# Altium PCB STM32_BalanceCar.PcbDoc (part 2 of 2)
Units mil, origin at the board's own origin, x right, y up, seen from the top; angles counter-clockwise.
Board outline 2206.41 x 3228.35 mil, 4 copper layers (Top Layer, Mid-Layer 1, Mid-Layer 2, Bottom Layer); 124 components, 106 nets, 508 pads, 271 vias.
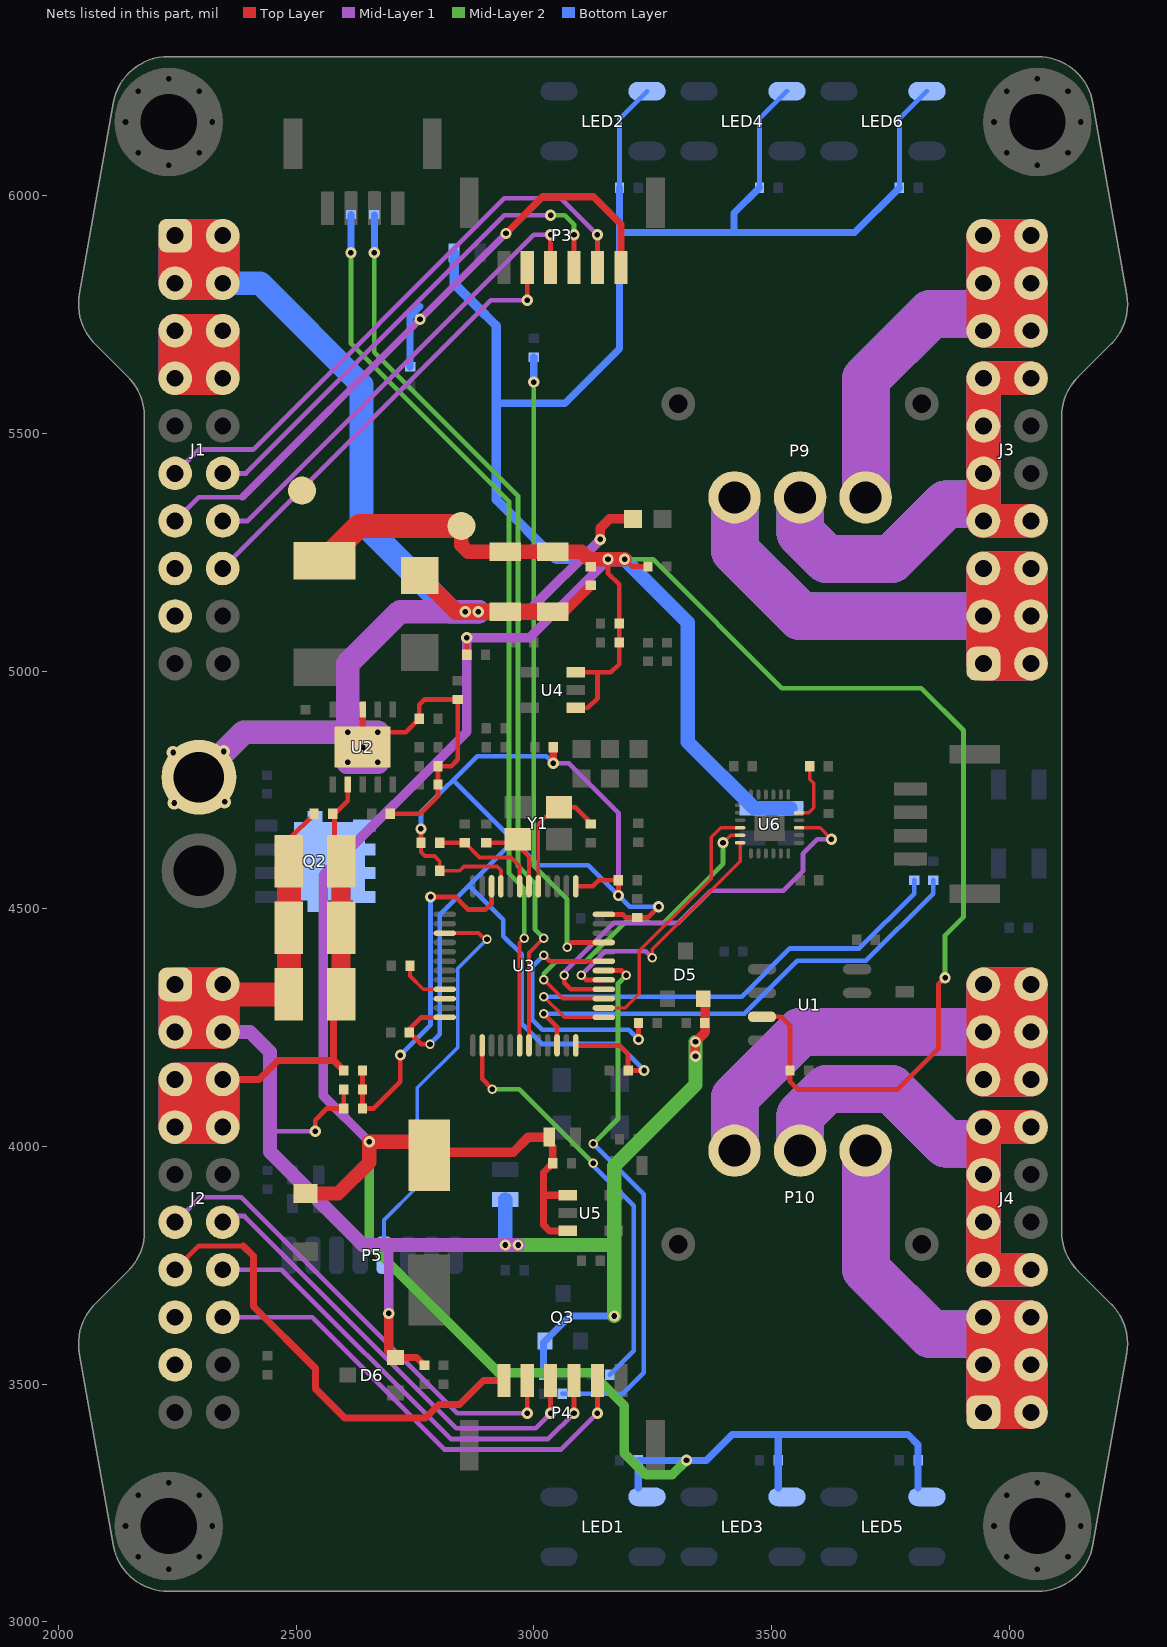
[diagram p4: the nets of this part, all layers, seen from the top]

## Via types
v1: diameter 23.62, hole 11.81, Top Layer to Bottom Layer, tented both sides, 229 vias
v2: diameter 19.68, hole 11.81, Top Layer to Bottom Layer, tented both sides, 29 vias
v3: diameter 27.56, hole 11.81, Top Layer to Bottom Layer, tented both sides, 8 vias
v4: diameter 22, hole 12, Top Layer to Bottom Layer, tented both sides, 5 vias

## Nets (pads, with @x,y where several pads share a name; then routed paths per layer and width w, separated by ;. In a path a pad name is that pad's centre, name@x,y a point inside that pad or via, vN(x,y) a via of type N, cw(c..) or ccw(c..) an arc to the next point about the centre after c; other vN are vias at no path point) (continued)
NetR26_2: R26.2 U6.11 | length 126.1
  Top Layer w7: U6.11@3558.07,4701.97 3577.97,4701.97 3589,4713 3589,4764.03 3580.32,4772.72 R26.2@3580.32,4800
NRST: C20.1 R11.2 U3.7 | length 231
  Top Layer w8: C20.1@2855,4639 2886,4608 2952,4608 2970.16,4589.84 U3.7@2970.16,4547.32
  Top Layer w10: R11.2@2802,4639 C20.1@2855,4639
PGND: C6.1 C10.1 C11.1 C12.1 C13.1 C14.1 C15.1 C16.1 C17.1 C18.1 C19.1 D1.1 D5.2 D6.2 D9.2 J1.1 J1.2 J1.3 J1.4 J2.1 J2.2 J2.3 J2.4 P6.2 pad.1@2512.35,5379.54 Q3.2 R2.2 R10.2 R13.1 R21.2 R25.1 R40.2 R51.2 U2.0 U2.8 | length 9785.1
  Top Layer w10: C10.1@2485,4646 C13.1@2539,4700 ; v1(2540.32,4032.26) 2540.32,4055.27 2565.05,4080 C6.1@2600.32,4080 R2.2@2600.32,4120 ; v4(2671.5,4871.5) 2730.5,4871.5 C18.1@2759,4900 2759,4929 2770.32,4940.31 R13.1@2840,4940.31 ; C14.1@2698.37,4700 2761.69,4700 2798.37,4736.68 C19.1@2798.37,4800 2826,4800 2840,4814 R13.1@2840,4939
  Top Layer w13.78: v4(2640,4840) U2.8@2640,4918.74
  Top Layer w15: D6.2@2709.2,3556.4 2753.28,3556.4 R40.2@2770,3539.68
  Top Layer w20: v1(2695.02,3649.05) 2695.02,3570.58 D6.2@2709.2,3556.4 ; C16.1@3040,5125 3066,5125 C17.1@3120.66,5179.66 ; v1(3140,5277) 3140,5301.02 3158.98,5320 D9.2@3209,5320 ; v1(3340,4190) v1(3340,4220) 3361,4241 D5.2@3361,4306.2
  Top Layer w35: D1.1@2760,5201 2836,5125 C16.1@3040,5125
  Top Layer w50: J2.2@2369.67,4320 C12.1@2485,4320 2485,4599.22 C10.1@2484.61,4599.61
  Top Layer w70.87: J2.1@2245.67,4340.95 J2.3@2245.67,4240.95 J2.4@2345.67,4240.95 ; J2.1@2245.67,4340.95 J2.4@2345.67,4240.95 ; J2.1@2245.67,4340.95 J2.2@2345.67,4340.95 J2.4@2345.67,4240.95 ; J1.1@2245.67,5915.75 J1.3@2245.67,5815.75 J1.4@2345.67,5815.75 ; J1.1@2245.67,5915.75 J1.4@2345.67,5815.75 ; J1.1@2245.67,5915.75 J1.2@2345.67,5915.75 J1.4@2345.67,5815.75
  Mid-Layer 1 w10: 2445,4031.84 2445.42,4032.26 v1@2539,4032.26
  Mid-Layer 1 w20: v1(2695.02,3649.05) 2695.02,3793 ; v1(2883,5125) 2988,5125 v1(3140,5277)
  Mid-Layer 1 w30: J2.4@2345.67,4240.95 2403.05,4240.95 2445,4199 2445,3989 2641,3793 2695.02,3793 v1(2967,3793)
  Mid-Layer 1 w50: P6.2@2295.67,4776.77 2390.39,4871.5 v4(2608.5,4871.5) ; v1(2883,5125) 2719,5125 2608.5,5014.5 v4(2608.5,4871.5) ; v4(2608.5,4871.5) v4(2671.5,4871.5) v4(2671.5,4808.5) ; v4(2608.5,4871.5) v4(2671.5,4808.5) ; v4(2608.5,4871.5) v4(2608.5,4808.5) v4(2671.5,4808.5)
  Mid-Layer 2 w30: v1(2940,3793) 3169.2,3793 ; v1(3169.2,3643.49) 3169.2,3959.2 3340,4130 v1(3340,4220)
  Mid-Layer 2 w50: P6.2@2295.67,4776.77 2390.39,4871.5 v4(2608.5,4871.5) ; v4(2608.5,4871.5) v4(2671.5,4808.5) ; v4(2608.5,4871.5) v4(2671.5,4871.5) v4(2671.5,4808.5) ; v4(2608.5,4871.5) v4(2608.5,4808.5) v4(2671.5,4808.5)
  Bottom Layer w15: R51.2@3020.32,3520 Q3.2@3020.32,3587.52 ; Q3.2@3023.6,3590.8 3076.29,3643.49 v1(3169.2,3643.49)
  Bottom Layer w30: R21.2@2940,3888.5 v1(2940,3793) v1(2967,3793)
  Bottom Layer w50: J1.4@2345.67,5815.75 2424.31,5815.75 2637.82,5602.24 2637.82,5313.07 2825.89,5125 v1(2883,5125)
  Bottom Layer w70.87: J2.1@2245.67,4340.95 J2.2@2345.67,4340.95 J2.4@2345.67,4240.95 ; J2.1@2245.67,4340.95 J2.4@2345.67,4240.95 ; J2.1@2245.67,4340.95 J2.3@2245.67,4240.95 J2.4@2345.67,4240.95 ; J1.1@2245.67,5915.75 J1.2@2345.67,5915.75 J1.4@2345.67,5815.75 ; J1.1@2245.67,5915.75 J1.4@2345.67,5815.75 ; J1.1@2245.67,5915.75 J1.3@2245.67,5815.75 J1.4@2345.67,5815.75
  other v1: 2856,5125
  other v3: 2243.75,4722.63 2349.82,4724.85 2241.52,4828.69 2347.59,4830.92
POWER_EN: R50.1 U3.26 | length 880.6
  Top Layer w10: U3.26@2891.42,4212.68 2891.42,4142.18 v2(2912.97,4120.62)
  Mid-Layer 2 w10: v2(2912.97,4120.62) 2969.38,4120.62 v2(3125,3965)
  Bottom Layer w10: v2@3120,3965 3210,3875 3210,3570.32 R50.1@3159.68,3520
PVDD+: C10.2 C11.2 C12.2 C13.2 J1.5 J1.6 J1.7 J1.8 J2.5 J2.6 J2.7 J2.8 Q2.2 R1.1 U2.2 | length 3026.8
  Top Layer w10: C10.2@2581,4614 2581,4700 2608.5,4727.5 U2.2@2608.5,4761.26
  Top Layer w15: J2.6@2345.67,4140.95 2421.95,4140.95 2462,4181 2579,4181 C12.2@2579,4304 ; 2579.16,4181.16 R1.1@2600.32,4160
  Top Layer w40: C12.2@2595,4320 C10.2@2595,4619.57
  Top Layer w70.87: J2.5@2245.67,4140.95 J2.6@2345.67,4140.95 J2.8@2345.67,4040.95 ; J2.5@2245.67,4140.95 J2.8@2345.67,4040.95 ; J2.5@2245.67,4140.95 J2.7@2245.67,4040.95 J2.8@2345.67,4040.95 ; J1.5@2245.67,5715.75 J1.7@2245.67,5615.75 J1.8@2345.67,5615.75 ; J1.5@2245.67,5715.75 J1.8@2345.67,5615.75 ; J1.5@2245.67,5715.75 J1.6@2345.67,5715.75 J1.8@2345.67,5615.75
  Bottom Layer w70.87: J2.5@2245.67,4140.95 J2.7@2245.67,4040.95 J2.8@2345.67,4040.95 ; J2.5@2245.67,4140.95 J2.8@2345.67,4040.95 ; J2.5@2245.67,4140.95 J2.6@2345.67,4140.95 J2.8@2345.67,4040.95 ; J1.5@2245.67,5715.75 J1.6@2345.67,5715.75 J1.8@2345.67,5615.75 ; J1.5@2245.67,5715.75 J1.8@2345.67,5615.75 ; J1.5@2245.67,5715.75 J1.7@2245.67,5615.75 J1.8@2345.67,5615.75
PWM_TEMP: R24.2 U3.43 | length 553.3
  Top Layer w10: v2(3021.08,4402.35) 3033.58,4389.84 U3.43@3147.32,4389.84 ; v1(3220.32,4225) R24.2@3220.32,4260
  Bottom Layer w10: v2(3021.08,4402.35) 2996.14,4377.41 2996.14,4267.6 3018.09,4245.65 3199.66,4245.65 v1(3220.32,4225)
SCK: P5.5 U3.15 | length 849.4
  Top Layer w8: U3.15@2812.68,4448.9 2883.68,4448.9 v2@2900.8,4431.78
  Bottom Layer w8: P5.5@2685,3771.5 2685,3845.53 2755,3915.53 2755,4123.46 2840.02,4208.48 2840.02,4374.48 v2(2901.54,4436)
SENSOR_CLK: U3.39 U6.23 | length 714.8
  Top Layer w7: v1(3398,4638.98) 3413.75,4654.73 U6.23@3434.06,4654.73
  Top Layer w8: v2(3021.08,4350.94) 3060.92,4311.1 U3.39@3147.32,4311.1
  Mid-Layer 2 w10: v2(3021.08,4350.94) 3021.08,4363.35 3047.1,4389.38 3109.38,4389.38 3191.15,4471.15 3242.33,4471.15 3242.65,4470.84 3273.84,4470.84 3398,4595 v1(3398,4638.98)
SENSOR_CLK_A: J1.14 P3.4 | length 1007.7
  Top Layer w10: P3.4@3035.39,5848.78 v1(3035.39,5917.52)
  Mid-Layer 1 w10: J1.14@2345.67,5315.75 2397.97,5315.75 2999.74,5917.52 v1(3035.39,5917.52)
SENSOR_CLK_B: J2.14 P4.4 | length 977.6
  Top Layer w10: v1(3084.61,3439.18) P4.4@3084.61,3507.91
  Mid-Layer 1 w10: J2.14@2345.67,3740.95 2469.05,3740.95 2825.11,3384.89 3030.32,3384.89 v1(3084.61,3439.18)
SENSOR_CS: U3.38 U6.22 | length 548
  Top Layer w7: U3.38@3147.32,4291.42 3192.42,4291.42 3222,4321 3222,4412 3373,4563 3373,4650 3393.47,4670.47 U6.22@3434.06,4670.47
SENSOR_CS_A: J1.16 P3.5 | length 952.2
  Top Layer w10: v1(2986.18,5780.05) P3.5@2986.18,5848.78
  Mid-Layer 1 w10: J1.16@2345.67,5224.97 J1.16@2345.67,5215.75 2909.97,5780.05 v1(2986.18,5780.05)
SENSOR_CS_B: J2.16 P4.5 | length 1003.9
  Top Layer w10: v1(3133.82,3439.18) P4.5@3133.82,3507.91
  Mid-Layer 1 w10: J2.16@2345.67,3640.95 2534.05,3640.95 2812.44,3362.56 3057.2,3362.56 v1(3133.82,3439.18)
SENSOR_MISO: U3.40 U6.9 | length 886.3
  Top Layer w7: U6.9@3558.07,4670.47 3602.03,4670.47 v1(3626,4646.5)
  Top Layer w10: v2(3064.06,4360.32) 3064.06,4344.69 3077.96,4330.79 U3.40@3147.32,4330.79
  Mid-Layer 1 w10: v2@3061.33,4363.04 3168.62,4470.33 3304.33,4470.33 3372,4538 3525,4538 3566,4579 3566,4616 3596.5,4646.5 v1(3626,4646.5)
SENSOR_MISO_A: J1.12 P3.3 | length 1062.3
  Top Layer w10: P3.3@3084.61,5848.78 v1(3084.61,5917.52)
  Mid-Layer 1 w10: J1.12@2345.67,5415.75 2394.62,5415.75 2937.69,5958.82 v1(3035.39,5958.82)
  Mid-Layer 2 w10: v1(3035.39,5958.82) 3064.83,5958.82 3084.61,5939.04 v1(3084.61,5917.52)
SENSOR_MISO_B: J2.12 P4.3 | length 961.5
  Top Layer w10: v1(3035.39,3439.18) P4.3@3035.39,3507.91
  Mid-Layer 1 w10: J2.12@2345.67,3840.95 2358.42,3853.7 2391.3,3853.7 2837.31,3407.69 3003.9,3407.69 v1(3035.39,3439.18)
SENSOR_MOSI: U3.41 U6.24 | length 545.4
  Top Layer w7: v2(3249,4397) 3249,4415 3434.06,4600.06 U6.24@3434.06,4638.98
  Top Layer w10: v2(3100,4360.32) 3109.84,4350.47 U3.41@3147.32,4350.47
  Mid-Layer 1 w10: v2(3100,4360.32) 3150.16,4410.47 3235.53,4410.47 v2(3249,4397)
SENSOR_MOSI_A: J1.11 P3.2 | length 1228.4
  Top Layer w10: P3.2@3133.82,5848.78 v1(3133.82,5917.52)
  Mid-Layer 1 w10: J1.11@2245.67,5415.75 2295.67,5465.75 2409.57,5465.75 2938.18,5994.35 3056.98,5994.35 v1(3133.82,5917.52)
SENSOR_MOSI_B: J2.11 P4.2 | length 1019.2
  Top Layer w10: v1(2986.18,3439.18) P4.2@2986.18,3507.91
  Mid-Layer 1 w10: J2.11@2245.67,3840.95 2298.24,3893.51 2384.67,3893.51 2839,3439.18 v1(2986.18,3439.18)
SHA_1: J3.1 J3.2 J3.3 J3.4 J3.5 J3.6 P9.1 | length 5807
  Top Layer w70.87: J3.4@4045.67,5115.75 J3.5@3945.67,5215.75 ; J3.3@3945.67,5115.75 J3.1@3945.67,5015.75 J3.2@4045.67,5015.75 ; J3.3@3945.67,5115.75 J3.2@4045.67,5015.75 ; J3.3@3945.67,5115.75 J3.5@3945.67,5215.75 ; J3.5@3945.67,5215.75 J3.6@4045.67,5215.75 J3.2@4045.67,5015.75
  Mid-Layer 1 w70.87: J3.1@3945.67,5015.75 J3.4@4045.67,5115.75 ; J3.1@3945.67,5015.75 J3.2@4045.67,5015.75 J3.4@4045.67,5115.75 ; J3.1@3945.67,5015.75 J3.3@3945.67,5115.75 ; J3.3@3945.67,5115.75 J3.6@4045.67,5215.75 ; J3.3@3945.67,5115.75 J3.5@3945.67,5215.75 J3.6@4045.67,5215.75 ; J3.3@3945.67,5115.75 J3.4@4045.67,5115.75 ; J3.4@4045.67,5115.75 J3.6@4045.67,5215.75
  Mid-Layer 1 w100: P9.1@3422.2,5365.35 3422.2,5254.35 3560.81,5115.75 J3.3@3945.67,5115.75
  Mid-Layer 2 w70.87: J3.1@3945.67,5015.75 J3.4@4045.67,5115.75 ; J3.1@3945.67,5015.75 J3.2@4045.67,5015.75 J3.4@4045.67,5115.75 ; J3.1@3945.67,5015.75 J3.3@3945.67,5115.75 ; J3.3@3945.67,5115.75 J3.6@4045.67,5215.75 ; J3.3@3945.67,5115.75 J3.5@3945.67,5215.75 J3.6@4045.67,5215.75 ; J3.3@3945.67,5115.75 J3.4@4045.67,5115.75 ; J3.4@4045.67,5115.75 J3.6@4045.67,5215.75
  Mid-Layer 2 w100: P9.1@3422.2,5365.35 3422.2,5254.35 3560.81,5115.75 J3.3@3945.67,5115.75
  Bottom Layer w70.87: J3.4@4045.67,5115.75 J3.5@3945.67,5215.75 ; J3.3@3945.67,5115.75 J3.1@3945.67,5015.75 J3.2@4045.67,5015.75 ; J3.3@3945.67,5115.75 J3.2@4045.67,5015.75 ; J3.3@3945.67,5115.75 J3.5@3945.67,5215.75 ; J3.5@3945.67,5215.75 J3.6@4045.67,5215.75 J3.2@4045.67,5015.75
  Bottom Layer w100: P9.1@3422.2,5365.35 3422.2,5254.35 3560.81,5115.75 J3.3@3945.67,5115.75
SHA_2: J4.1 J4.2 J4.3 J4.4 J4.5 J4.6 P10.1 | length 5146.6
  Top Layer w70.87: J4.4@4045.67,3540.95 J4.5@3945.67,3640.95 ; J4.3@3945.67,3540.95 J4.5@3945.67,3640.95 ; J4.3@3945.67,3540.95 J4.2@4045.67,3440.95 ; J4.3@3945.67,3540.95 J4.1@3945.67,3440.95 J4.2@4045.67,3440.95 ; J4.5@3945.67,3640.95 J4.6@4045.67,3640.95 J4.2@4045.67,3440.95
  Mid-Layer 1 w70.87: J4.4@4045.67,3540.95 J4.5@3945.67,3640.95 ; J4.3@3945.67,3540.95 J4.5@3945.67,3640.95 ; J4.3@3945.67,3540.95 J4.2@4045.67,3440.95 ; J4.3@3945.67,3540.95 J4.1@3945.67,3440.95 J4.2@4045.67,3440.95 ; J4.5@3945.67,3640.95 J4.6@4045.67,3640.95 J4.2@4045.67,3440.95
  Mid-Layer 1 w100: P10.1@3697.8,3991.34 3697.8,3742.98 3835.19,3605.59 3930.93,3605.59
  Mid-Layer 2 w70.87: J4.4@4045.67,3540.95 J4.5@3945.67,3640.95 ; J4.3@3945.67,3540.95 J4.1@3945.67,3440.95 J4.2@4045.67,3440.95 ; J4.3@3945.67,3540.95 J4.2@4045.67,3440.95 ; J4.3@3945.67,3540.95 J4.5@3945.67,3640.95 ; J4.5@3945.67,3640.95 J4.6@4045.67,3640.95 J4.2@4045.67,3440.95
  Mid-Layer 2 w100: P10.1@3697.8,3991.34 3697.8,3742.98 3835.19,3605.59 3930.93,3605.59
  Bottom Layer w70.87: J4.4@4045.67,3540.95 J4.5@3945.67,3640.95 ; J4.3@3945.67,3540.95 J4.5@3945.67,3640.95 ; J4.3@3945.67,3540.95 J4.2@4045.67,3440.95 ; J4.3@3945.67,3540.95 J4.1@3945.67,3440.95 J4.2@4045.67,3440.95 ; J4.5@3945.67,3640.95 J4.6@4045.67,3640.95 J4.2@4045.67,3440.95
  Bottom Layer w100: P10.1@3697.8,3991.34 3697.8,3742.98 3835.19,3605.59 3930.93,3605.59
SHB_1: J3.7 J3.8 J3.9 J3.11 J3.13 J3.14 P9.2 | length 3472.2
  Top Layer w70.87: J3.8@4045.67,5315.75 J3.7@3945.67,5315.75 J3.9@3945.67,5415.75 J3.11@3945.67,5515.75 J3.13@3945.67,5615.75 J3.14@4045.67,5615.75
  Mid-Layer 1 w70.87: J3.7@3945.67,5315.75 J3.8@4045.67,5315.75 ; 3945.67,5353.18 J3.9@3945.67,5415.75 J3.11@3945.67,5515.75 J3.13@3945.67,5615.75 J3.14@4045.67,5615.75
  Mid-Layer 1 w100: P9.2@3560,5365.35 3560,5291.45 3615.71,5235.74 3751.86,5235.74 3867.22,5351.11 3930.93,5351.11
  Mid-Layer 2 w70.87: J3.7@3945.67,5315.75 J3.8@4045.67,5315.75 ; 3945.67,5353.18 J3.9@3945.67,5415.75 J3.11@3945.67,5515.75 J3.13@3945.67,5615.75 J3.14@4045.67,5615.75
  Mid-Layer 2 w100: P9.2@3560,5365.35 3560,5291.45 3615.71,5235.74 3751.86,5235.74 3867.22,5351.11 3930.93,5351.11
  Bottom Layer w70.87: J3.8@4045.67,5315.75 J3.7@3945.67,5315.75 J3.9@3945.67,5415.75 J3.11@3945.67,5515.75 J3.13@3945.67,5615.75 J3.14@4045.67,5615.75
  Bottom Layer w100: P9.2@3560,5365.35 3560,5291.45 3615.71,5235.74 3751.86,5235.74 3867.22,5351.11 3930.93,5351.11
SHB_2: J4.7 J4.8 J4.9 J4.11 J4.13 J4.14 P10.2 | length 3434.8
  Top Layer w70.87: J4.8@4045.67,3740.95 J4.7@3945.67,3740.95 J4.9@3945.67,3840.95 J4.11@3945.67,3940.95 J4.13@3945.67,4040.95 J4.14@4045.67,4040.95
  Mid-Layer 1 w70.87: 3945.67,4003.51 J4.11@3945.67,3940.95 J4.9@3945.67,3840.95 J4.7@3945.67,3740.95 J4.8@4045.67,3740.95 ; J4.13@3945.67,4040.95 J4.14@4045.67,4040.95
  Mid-Layer 1 w100: P10.2@3560,3991.34 3560,4065.24 3615.71,4120.95 3751.86,4120.95 3867.22,4005.59 3930.93,4005.59
  Mid-Layer 2 w70.87: 3945.67,4003.51 J4.11@3945.67,3940.95 J4.9@3945.67,3840.95 J4.7@3945.67,3740.95 J4.8@4045.67,3740.95 ; J4.13@3945.67,4040.95 J4.14@4045.67,4040.95
  Mid-Layer 2 w100: P10.2@3560,3991.34 3560,4065.24 3615.71,4120.95 3751.86,4120.95 3867.22,4005.59 3930.93,4005.59
  Bottom Layer w70.87: 3945.67,4003.51 J4.11@3945.67,3940.95 J4.9@3945.67,3840.95 J4.7@3945.67,3740.95 J4.8@4045.67,3740.95 ; J4.13@3945.67,4040.95 J4.14@4045.67,4040.95
  Bottom Layer w100: P10.2@3560,3991.34 3560,4065.24 3615.71,4120.95 3751.86,4120.95 3867.22,4005.59 3930.93,4005.59
SHC_1: J3.15 J3.16 J3.17 J3.18 J3.19 J3.20 P9.3 | length 5346.6
  Top Layer w70.87: J3.17@3945.67,5815.75 J3.18@4045.67,5815.75 ; J3.17@3945.67,5815.75 J3.19@3945.67,5915.75 ; J3.17@3945.67,5815.75 J3.15@3945.67,5715.75 J3.16@4045.67,5715.75 ; J3.17@3945.67,5815.75 J3.16@4045.67,5715.75 ; J3.19@3945.67,5915.75 J3.20@4045.67,5915.75 J3.18@4045.67,5815.75 ; J3.19@3945.67,5915.75 J3.18@4045.67,5815.75 ; J3.16@4045.67,5715.75 J3.18@4045.67,5815.75
  Mid-Layer 1 w70.87: J3.18@4045.67,5815.75 J3.15@3945.67,5715.75 ; J3.15@3945.67,5715.75 J3.17@3945.67,5815.75 ; J3.15@3945.67,5715.75 J3.16@4045.67,5715.75 J3.20@4045.67,5915.75 ; J3.17@3945.67,5815.75 J3.20@4045.67,5915.75 ; J3.17@3945.67,5815.75 J3.19@3945.67,5915.75 J3.20@4045.67,5915.75
  Mid-Layer 1 w100: P9.3@3697.8,5365.35 3697.8,5613.72 3835.19,5751.11 3930.93,5751.11
  Mid-Layer 2 w70.87: J3.18@4045.67,5815.75 J3.15@3945.67,5715.75 ; J3.15@3945.67,5715.75 J3.17@3945.67,5815.75 ; J3.15@3945.67,5715.75 J3.16@4045.67,5715.75 J3.20@4045.67,5915.75 ; J3.17@3945.67,5815.75 J3.20@4045.67,5915.75 ; J3.17@3945.67,5815.75 J3.19@3945.67,5915.75 J3.20@4045.67,5915.75
  Mid-Layer 2 w100: P9.3@3697.8,5365.35 3697.8,5613.72 3835.19,5751.11 3930.93,5751.11
  Bottom Layer w70.87: J3.17@3945.67,5815.75 J3.18@4045.67,5815.75 ; J3.17@3945.67,5815.75 J3.19@3945.67,5915.75 ; J3.17@3945.67,5815.75 J3.15@3945.67,5715.75 J3.16@4045.67,5715.75 ; J3.17@3945.67,5815.75 J3.16@4045.67,5715.75 ; J3.19@3945.67,5915.75 J3.20@4045.67,5915.75 J3.18@4045.67,5815.75 ; J3.19@3945.67,5915.75 J3.18@4045.67,5815.75 ; J3.16@4045.67,5715.75 J3.18@4045.67,5815.75
  Bottom Layer w100: P9.3@3697.8,5365.35 3697.8,5613.72 3835.19,5751.11 3930.93,5751.11
SHC_2: J4.15 J4.16 J4.17 J4.18 J4.19 J4.20 P10.3 | length 6007
  Top Layer w70.87: J4.17@3945.67,4240.95 J4.16@4045.67,4140.95 ; J4.17@3945.67,4240.95 J4.15@3945.67,4140.95 J4.16@4045.67,4140.95 ; J4.17@3945.67,4240.95 J4.19@3945.67,4340.95 ; J4.17@3945.67,4240.95 J4.18@4045.67,4240.95 ; J4.19@3945.67,4340.95 J4.18@4045.67,4240.95 ; J4.19@3945.67,4340.95 J4.20@4045.67,4340.95 J4.18@4045.67,4240.95 ; J4.16@4045.67,4140.95 J4.18@4045.67,4240.95
  Mid-Layer 1 w70.87: J4.17@3945.67,4240.95 J4.16@4045.67,4140.95 ; J4.17@3945.67,4240.95 J4.15@3945.67,4140.95 J4.16@4045.67,4140.95 ; J4.17@3945.67,4240.95 J4.19@3945.67,4340.95 ; J4.17@3945.67,4240.95 J4.18@4045.67,4240.95 ; J4.19@3945.67,4340.95 J4.18@4045.67,4240.95 ; J4.19@3945.67,4340.95 J4.20@4045.67,4340.95 J4.18@4045.67,4240.95 ; J4.16@4045.67,4140.95 J4.18@4045.67,4240.95
  Mid-Layer 1 w100: P10.3@3422.2,3991.34 3422.2,4102.34 3560.81,4240.95 J4.17@3945.67,4240.95
  Mid-Layer 2 w70.87: J4.17@3945.67,4240.95 J4.18@4045.67,4240.95 ; J4.17@3945.67,4240.95 J4.19@3945.67,4340.95 ; J4.17@3945.67,4240.95 J4.15@3945.67,4140.95 J4.16@4045.67,4140.95 ; J4.17@3945.67,4240.95 J4.16@4045.67,4140.95 ; J4.19@3945.67,4340.95 J4.20@4045.67,4340.95 J4.18@4045.67,4240.95 ; J4.19@3945.67,4340.95 J4.18@4045.67,4240.95 ; J4.16@4045.67,4140.95 J4.18@4045.67,4240.95
  Mid-Layer 2 w100: P10.3@3422.2,3991.34 3422.2,4102.34 3560.81,4240.95 J4.17@3945.67,4240.95
  Bottom Layer w70.87: J4.17@3945.67,4240.95 J4.16@4045.67,4140.95 ; J4.17@3945.67,4240.95 J4.15@3945.67,4140.95 J4.16@4045.67,4140.95 ; J4.17@3945.67,4240.95 J4.19@3945.67,4340.95 ; J4.17@3945.67,4240.95 J4.18@4045.67,4240.95 ; J4.19@3945.67,4340.95 J4.18@4045.67,4240.95 ; J4.19@3945.67,4340.95 J4.20@4045.67,4340.95 J4.18@4045.67,4240.95 ; J4.16@4045.67,4140.95 J4.18@4045.67,4240.95
  Bottom Layer w100: P10.3@3422.2,3991.34 3422.2,4102.34 3560.81,4240.95 J4.17@3945.67,4240.95
SWCLK: R29.1 U3.37 | length 1041.3
  Top Layer w8: v2(3021.08,4315) 3064.34,4271.73 U3.37@3147.32,4271.73
  Bottom Layer w10: v2(3021.08,4315) 3437,4315 3538.71,4416.71 3684.71,4416.71 3800,4532 R29.1@3800,4560.31
SWDIO: R28.1 U3.34 | length 1029.9
  Top Layer w10: v2(3021.08,4279.06) 3048.9,4251.24 U3.34@3048.9,4212.68
  Bottom Layer w10: v2(3021.08,4279.06) 3443.07,4279.06 3554.5,4390.48 3698.48,4390.48 3840,4532 R28.1@3840,4560.31
USART1_RX: R32.1 U3.31 | length 1906.9
  Top Layer w8: U3.31@2989.84,4212.68 2989.84,4407.06 v2(3021.08,4438.29)
  Mid-Layer 2 w10: v1(2664.61,5879.72) 2664.61,5670.62 2967.03,5368.2 2967.03,4589.32 3002.32,4554.03 3002.32,4457.05 v2(3021.08,4438.29)
  Bottom Layer w15: v1(2664.61,5879.72) R32.1@2664.61,5959
USART1_RX_A: J1.15
USART1_RX_B: J2.15
USART1_TX: R33.1 U3.30 | length 1902.7
  Top Layer w8: U3.30@2970.16,4212.68 2970.16,4428.45 v2(2980,4438.29)
  Mid-Layer 2 w10: v1(2615.39,5879.72) 2615.39,5689.16 2947.81,5356.75 2947.81,4574.63 2980,4542.44 v2(2980,4438.29)
  Bottom Layer w15: v1(2615.39,5879.72) R33.1@2615.39,5960.31
USART1_TX_A: J1.17
USART1_TX_B: J2.17
USART3_RX: U3.22
USART3_TX: R30.2 U3.21 | length 105.9
  Top Layer w8: R30.2@2739.68,4380 2739.68,4358.56 2767.45,4330.79 U3.21@2812.68,4330.79
VCC3.3V: C1.1 C2.1 C3.1 C4.1 C5.2 L2.2 R11.1 U3.1 U3.9 U3.24 U3.36 U3.48 | length 3304.9
  Top Layer w8: R11.1@2762.63,4639 2762.63,4619.44 2771.07,4611 2791.05,4611 2802,4600.05 C5.2@2802,4580 ; C5.2@2801,4580 2844.39,4580 2853.39,4589 2923,4589 2930.79,4581.21 U3.9@2930.79,4547.32
  Top Layer w10: R11.1@2762.63,4639 v1(2762.63,4668) ; v2(2781.59,4215.15) 2763.22,4215.15 C1.1@2738.37,4240 2738.37,4247.05 2762.85,4271.53 2812.48,4271.53 U3.24@2812.68,4271.73 ; U3.36@3088.27,4212.68 3179.32,4212.68 3198.37,4193.63 C2.1@3198.37,4160 v1(3232,4160) ; U3.1@3088.27,4547.32 3124.32,4547.32 3137,4560 C3.1@3178,4560 v1(3178,4528) ; U3.48@3147.32,4488.27 3186.73,4488.27 3193.37,4481.63 C4.1@3217.37,4481.63 3239.54,4481.63 v1(3262.43,4504.52)
  Top Layer w15: v1(3041,4806) L2.2@3041,4840
  Mid-Layer 1 w10: v1(3041,4806) 3074,4806 3178,4702 v1(3178,4528)
  Bottom Layer w10: v1(2762.63,4668) 2762.63,4702.63 2881,4821 3026,4821 v1(3041,4806) ; v2(2781.59,4215.15) 2802.45,4236.01 2802.45,4487.11 2958.11,4642.76 ; 2830.43,4770.43 3009.04,4591.83 3114.17,4591.83 v1(3178,4528) 3201.48,4504.52 v1(3262.43,4504.52) ; 2864.08,4548.74 2935.98,4476.84 2935.98,4442.64 2974.65,4403.97 2974.65,4258.21 3017.11,4215.74 3176.26,4215.74 v1(3232,4160)
VCC3.3V1: J1.13 P3.1 R54.1 | length 1470.4
  Top Layer w15: v1(2941.58,5920.58) 3018.5,5997.5 3125.65,5997.5 3183.03,5940.12 P3.1@3183.03,5848.78
  Mid-Layer 1 w10: J1.13@2245.67,5315.75 2295.67,5365.75 2386.75,5365.75
  Mid-Layer 1 w15: 2386.75,5365.75 v1(2760.73,5739.73) v1(2941.58,5920.58)
  Bottom Layer w15: R54.1@2740,5639.69 2740,5745.9 2760.73,5766.62
VCC3.3V2: J2.13 P4.1 | length 981.3
  Top Layer w10: J2.13@2245.67,3740.95 2295.67,3790.95 2389,3790.95
  Top Layer w15: 2389,3790.95 2410.49,3769.46 2410.49,3663.71 2540.54,3533.66 2540.54,3491.06 2602.39,3429.21 2772.2,3429.21 2800.34,3457.35 2843.41,3457.35 2893.98,3507.91 P4.1@2936.97,3507.91
VCC_5.0V: B1.1 C7.1 C15.2 C16.2 C17.2 C22.1 C23.1 C36.2 C37.2 C38.2 C39.2 C45.2 C46.2 C47.1 C48.2 D7.2 L1.2 LED1.3 LED2.3 LED3.3 LED4.3 LED5.3 LED6.3 pad.1@2847.59,5305 R14.2 R22.2 R23.2 R37.2 R52.1 U1.3 U4.1 U4.3 U5.1 U5.3 | length 11554.4
  Top Layer w10: R14.2@2859,5034.43 v1(2859,5070) ; U4.1@3088.43,4922.6 3113.6,4922.6 3134,4943 3134,4997.4 ; U4.3@3088.43,4997.4 3162.24,4997.4 3179.68,5014.84 3179.68,5182.31 3156,5206 v1(3156,5235) ; v1(3191,5235) 3206,5220 R52.1@3240.32,5220 ; U1.3@3480,4273 3520,4273 3539,4254 C7.1@3539,4160 3539,4136 3555,4120 3765,4120 3850.93,4205.94 3850.93,4340.94 v1(3865,4355)
  Top Layer w15: 3020.32,3897.4 U5.1@3071.57,3897.4 ; C38.2@3026.35,4014.23 3040,4000.58 C39.2@3040,3965 3020.32,3945.32 3020.32,3835.39 3033.1,3822.6 U5.3@3071.57,3822.6
  Top Layer w20: B1.1@2786.2,3987.93 2956.79,3987.93 2988.85,4020 C38.2@3032.44,4020
  Top Layer w30: D7.2@2520,3901.02 2588.18,3901.02 2653.84,3966.68 v1(2653.84,4010.02) B1.1@2751.71,4010.02 ; pad.1@2847.59,5305 2847.59,5265.21 2861.81,5250.98 C15.2@2940,5250.98 3100.41,5250.98 3116.39,5235 v1(3191,5235)
  Top Layer w50: L1.2@2560,5232.2 2632.8,5305 pad.1@2847.59,5305
  Mid-Layer 1 w20: v1(2653.84,4010.02) 2556.88,4106.97 2556.88,4569.88 2859,4872 v1(2859,5070) 2991,5070 v1(3156,5235) v1(3191,5235)
  Mid-Layer 2 w10: v1(3156,5235) 3251,5235 3521.99,4964.01 3814.99,4964.01 3904,4875 3904,4483 3865,4444 v1(3865,4355)
  Mid-Layer 2 w20: v1(2653.84,4010.02) 2653.84,3796.16 2925.63,3524.37 3120.86,3524.37 3190.57,3454.66 3190.57,3354.43 3235,3310 3291.16,3310 v1(3321.16,3340)
  Bottom Layer w10: C37.2@3180.32,6016.7 3180.32,6161.82 LED2.3@3238.19,6219.69 ; C45.2@3474.65,6016.7 3474.65,6161.82 LED4.3@3532.52,6219.69 ; C46.2@3768.98,6016.7 3768.98,6161.82 LED6.3@3826.85,6219.69
  Bottom Layer w15: 2920.92,5563.39 3065.6,5563.39 3180.32,5678.1 C37.2@3180.32,6016.7 ; 3180.32,5922.16 3674.44,5922.16 C46.2@3768.98,6016.7 ; LED1.3@3219.68,3281.5 C36.2@3219.68,3340 v1(3321.16,3340) 3362.96,3340 3417.21,3394.25 3786.96,3394.25 3808.35,3372.86 C48.2@3808.35,3340 LED5.3@3808.35,3281.5 ; 3421.06,5922.16 3421.06,5963.11 C45.2@3474.65,6016.7 ; LED3.3@3514.02,3281.5 C47.1@3514.02,3340 3514.02,3394
  Bottom Layer w20: R37.2@2832.44,5880 2832.44,5814.85 2877.64,5769.66 2920.92,5726.37 2920.92,5360.83 3046.75,5235 v1(3156,5235)
  Bottom Layer w30: v1(3156,5235) v1(3191,5235) 3324,5102 3324,4851 3463.5,4711.5 R23.2@3540,4711.5
VOLTAGE_ADC: C6.2 R1.2 R2.1 U3.10 | length 778.3
  Top Layer w10: R1.2@2639.68,4160 C6.2@2639.68,4080 2662.92,4080 2719.37,4136.45 v1(2719.37,4192.37) ; v1(2782.96,4524.98) 2834.66,4524.98 2860.96,4498.69 2898.69,4498.69 2911.1,4511.1 U3.10@2911.1,4547.32
  Bottom Layer w10: v1(2719.37,4192.37) 2782.96,4255.96 v1(2782.96,4524.98)
WS2812A: R5.1 U3.42 | length 1150
  Top Layer w10: U3.42@3147.32,4370.16 3184.8,4370.16 v2(3194.65,4360.31)
  Mid-Layer 2 w10: v2(3125,4005.94) 3177.1,4058.04 3177.1,4342.77 v2(3194.65,4360.31)
  Bottom Layer w10: R5.1@3059.68,3480 3186.91,3480 3231.07,3524.16 3231.07,3899.88 v2(3125,4005.94)
WS2812B: R6.2 U3.45 | length 1351.3
  Top Layer w10: v2(3070,4419.37) 3079.84,4429.21 U3.45@3147.32,4429.21
  Mid-Layer 2 w10: v1(3000,5607.74) 3000,4590.04 3070,4520.04 v2(3070,4419.37)
  Bottom Layer w15: v1(3000,5607.74) R6.2@3000,5660.31
YI: C21.1 U3.5 Y1.1 | length 248.3
  Top Layer w8: U3.5@3009.53,4547.32 3009.53,4678.53 Y1.1@3033.5,4702.5
  Top Layer w10: Y1.1@3052.84,4713.46 3087.54,4713.46 3120,4681 C21.1@3120,4678.37
YO: C24.1 U3.6 Y1.3 | length 178.3
  Top Layer w8: Y1.3@2966.22,4646.54 2966.22,4632.78 2989.84,4609.16 U3.6@2989.84,4547.32
  Top Layer w10: C24.1@2900,4639 2958.69,4639 Y1.3@2966.22,4646.54
pads on no net: J3.10 J3.12 J4.10 J4.12 LED5.4 LED6.4 P9.0 P10.0 U2.3 U2.10 U3.11 U3.12 U3.19 U3.28 U3.46 U6.1 U6.2 U6.3 U6.4 U6.5 U6.6 U6.7 U6.14 U6.15 U6.16 U6.17 U6.19 U6.21 U6.25
copper on no net: | length 244.6
  Mid-Layer 1 w10: v1(2700.32,4451) 2723.65,4451 2750.61,4477.96 2750.61,4597.21 2795.77,4642.37
  other v1: 3915,3100 3895,3186.7

## Polygon pours and split planes (outlines as drawn)
PVDD+ on Bottom Layer "Top Layer-No Net 1" (solid, remove dead copper, pour order 1004): 2180,3995 2469.34,3995 2588.04,3995 2729,4090 2729,4685 2729,5165 2729,5465 2729,5640 2580.62,5740 2180,5740 2180,3995
DGND on Bottom Layer "Keep-Out Layer-No Net" (hatched 45Degree grid 20 track 8, remove dead copper, pour order 1000): 3330.71,4776.77 3397.64,4843.7 3594.49,4843.7 3661.42,4776.77 3661.42,4579.92 3594.49,4512.99 3397.64,4512.99 3330.71,4579.92 3330.71,4776.77
DGND on Bottom Layer "Keep-Out Layer-No Net" (hatched 90Degree grid 20 track 8, remove dead copper, pour order 1001): 2040,6213.78 2130.2,6292.52 4159.8,6292.52 4250,6213.78 4250,3142.91 4159.8,3064.17 2130.2,3064.17 2040,3142.91 2040,6213.78
BAT+ on Bottom Layer "Top Layer-No Net 1" (solid, remove dead copper, pour order 1000): 2295,4662 2465,4662 2465,4505 2340,4505 2327,4505 2295,4537 2295,4662
PVDD+ on Top Layer "Top Layer-No Net" (solid, remove dead copper, pour order 1003): 2557.14,4375 2557.14,4722.14 2571.53,4736.53 2591.9,4736.53 2591.9,4685.1 2625,4652 2625,4375 2557.14,4375
PVDD+ on Top Layer "Top Layer-No Net" (solid, remove dead copper, pour order 1002): 2190.79,4205 2360.79,4375 2625,4375 2625,4219 2560,4154 2406,4000 2338,4000 2191,4000 2190.79,4000.21 2190.79,4205
PGND on Top Layer "Top Layer-No Net" (solid, remove dead copper, pour order 1001): 2195.15,5955 2454.36,5955 2554.36,5854.07 2554.36,4289.68 2554.36,4275.55 2483.36,4203.89 2473.36,4193.8 2195.15,4193.8 2195.15,5955
PVDD+ on Top Layer "Top Layer-No Net" (solid, remove dead copper, pour order 1000): 2565,4233 2625,4233 2625,4278 2565,4278 2565,4233
NetC8_2 on Top Layer "Top Layer-No Net 1" (solid, remove dead copper, pour order 1006): 2480,4910 2490,4900 2650,4900 2725,4975 2780,4975 2800,4995 2800,5081 2800,5082 2787,5095 2539,5095 2480,5036 2480,4910
PVDD+ on Top Layer "Top Layer-No Net 1" (solid, remove dead copper, pour order 1000): 2565,4652 2565,4730 2580,4745 2581,4746 2581,4778 2630,4778 2630,4665 2630,4657 2625,4652 2565,4652
DGND on Top Layer "Keep-Out Layer-No Net" (hatched 90Degree grid 20 track 8, remove dead copper, pour order 1002): 2040,6213.78 2130.2,6292.52 4159.8,6292.52 4250,6213.78 4250,3142.91 4159.8,3064.17 2130.2,3064.17 2040,3142.91 2040,6213.78
DGND on Top Layer "Keep-Out Layer-No Net" (hatched 45Degree grid 20 track 8, remove dead copper, pour order 1003): 3330.71,4579.92 3397.64,4512.99 3594.49,4512.99 3661.42,4579.92 3661.42,4776.77 3594.49,4843.7 3397.64,4843.7 3330.71,4776.77 3330.71,4579.92
DGND on Mid-Layer 1 "Keep-Out Layer-No Net" (hatched 90Degree grid 20 track 8, remove dead copper, pour order 1004): 3330.71,4579.92 3397.64,4512.99 3594.49,4512.99 3661.42,4579.92 3661.42,4776.77 3594.49,4843.7 3397.64,4843.7 3330.71,4776.77 3330.71,4579.92
DGND on Mid-Layer 1 "Keep-Out Layer-No Net" (hatched 45Degree grid 20 track 8, remove dead copper, pour order 1005): 2040,6213.78 2130.2,6292.52 4159.8,6292.52 4250,6213.78 4250,3142.91 4159.8,3064.17 2130.2,3064.17 2040,3142.91 2040,6213.78
DGND on Mid-Layer 2 "Keep-Out Layer-No Net" (hatched 90Degree grid 20 track 8, remove dead copper, pour order 1006): 3330.71,4579.92 3397.64,4512.99 3594.49,4512.99 3661.42,4579.92 3661.42,4776.77 3594.49,4843.7 3397.64,4843.7 3330.71,4776.77 3330.71,4579.92
DGND on Mid-Layer 2 "Keep-Out Layer-No Net" (hatched 45Degree grid 20 track 8, remove dead copper, pour order 1007): 2035,6213.78 2125.41,6292.52 4159.59,6292.52 4250,6213.78 4250,3142.91 4159.59,3064.17 2125.41,3064.17 2035,3142.91 2035,6213.78

## Keep-outs
Keep-Out Layer:
  lines w5: 2115.3,3161.77 ccw(c2231.62,3182.28) 2231.62,3064.17 4059.73,3064.17 ccw(c4059.73,3182.28) 4176.04,3161.77 ; 2115.3,3161.78 2044.24,3564.75 cw(c2160.56,3585.26) 2077.04,3668.78 2146.51,3738.24 ccw(c2062.99,3821.76) 2181.1,3821.76 2181.1,5534.94 ccw(c2062.99,5534.94) 2146.51,5618.45 2077.04,5687.92 cw(c2160.56,5771.44) 2044.24,5791.95 2115.3,6194.92 cw(c2231.62,6174.41) 2231.62,6292.52 4059.73,6292.52 cw(c4059.73,6174.41) 4176.04,6194.92 4247.1,5791.95 cw(c4130.78,5771.44) 4214.3,5687.92 4144.83,5618.45 ccw(c4228.35,5534.94) 4110.24,5534.94 4110.24,3821.76 ccw(c4228.35,3821.76) 4144.83,3738.24 4214.3,3668.78 cw(c4130.78,3585.26) 4247.1,3564.75 4176.04,3161.78
  lines w10: 3267.72,4579.92 ccw(c3299.21,4579.92) 3330.71,4579.92 3330.71,4776.77 ccw(c3299.21,4776.77) 3267.72,4776.77 3267.72,4579.92 ; 3397.64,4450 cw(c3397.64,4481.5) 3397.64,4512.99 3594.49,4512.99 cw(c3594.49,4481.5) 3594.49,4450 3397.64,4450 ; 3397.64,4843.7 cw(c3397.64,4875.2) 3397.64,4906.7 3594.49,4906.69 cw(c3594.49,4875.2) 3594.49,4843.7 3397.64,4843.7 ; 3661.42,4579.92 ccw(c3692.91,4579.92) 3724.41,4579.92 3724.41,4776.77 ccw(c3692.91,4776.77) 3661.42,4776.77 3661.42,4579.92

## Silkscreen, mask and mechanical layers (free items; w line width, h text height)
Top Overlay:
  drawing of 95 lines, arcs and shapes, not listed
  text "USART1" at 2748.79,6236.26 h40 r180
  text "Encoder.A" at 3230,6176.26 h40 r180
  text "Motor.A" at 3720,6005 h50 r180
  text "GND" at 2583.71,5801.26 h35 r90
  text "TXD" at 2632.92,5801.26 h35 r90
  text "RXD" at 2682.13,5801.26 h35 r90
  text "5V" at 2731.34,5801.26 h35 r90
  text "GND" at 2954.49,5668.7 h35 r90
  text "CS" at 3003.71,5668.7 h35 r90
  text "CLK" at 3052.92,5668.7 h35 r90
  text "MISO" at 3102.13,5668.7 h35 r90
  text "MOSI" at 3151.34,5668.7 h35 r90
  text "3.3V" at 3200.56,5668.7 h35 r90
  text "GND" at 2561.7,5361.6 h35
  text "5.0V" at 2795,5345 h35
  text "FanFan" at 3390,4970 h60
  text "V1.3" at 3725,4905 h38
  text "GND" at 2240,4895 h45
  text "7-26V" at 2420,4890 h45 r270
  text "GND" at 4000,4734.64 h35
  text "CLK" at 4000,4685.43 h35
  text "DIO" at 4000,4636.22 h35
  text "TX3" at 4000,4587 h35
  text "VCC" at 2240,4415 h45
  text "3.3V" at 2919.44,3688 h35 r270
  text "MOSI" at 2968.66,3688 h35 r270
  text "MISO" at 3017.87,3688 h35 r270
  text "CLK" at 3067.08,3688 h35 r270
  text "CS" at 3116.29,3688 h35 r270
  text "GND" at 3165.51,3688 h35 r270
  text "Motor.B" at 3400,3351.7 h50
  text "Encoder.B" at 2890,3180.44 h40
Bottom Overlay:
  drawing of 1069 lines, arcs and shapes, not listed
  text "Professional Bug Coder" at 3800,5765 h60
  text "FanFan" at 3800,5665 h60
  text "PowerSwitch" at 3933.5,4881.65 h40 r90

## Text inside footprints (layer, text, board x,y; h text height)
LED1: Bottom Overlay "RGB" at 3128.17,3153 h35 r270
LED2: Bottom Overlay "RGB" at 3128.17,6109.7 h35 r270
LED3: Bottom Overlay "RGB" at 3422.5,3153 h35 r270
LED4: Bottom Overlay "RGB" at 3422.5,6109.7 h35 r270
LED5: Bottom Overlay "RGB" at 3716.83,3153 h35 r270
LED6: Bottom Overlay "RGB" at 3716.83,6109.7 h35 r270